# Altium PCB Wctrl-pcb1.PcbDoc (part 2 of 2)
Units mm, origin at the board's own origin, x right, y up, seen from the top; angles counter-clockwise.
Board outline 71 x 39 mm, 4 copper layers (Top Layer, Layer 1, Layer 2, Bottom Layer), stack 1.812 mm thick; 64 components, 75 nets, 267 pads, 81 vias.
Unrouted connection lines stored in the file: 1.
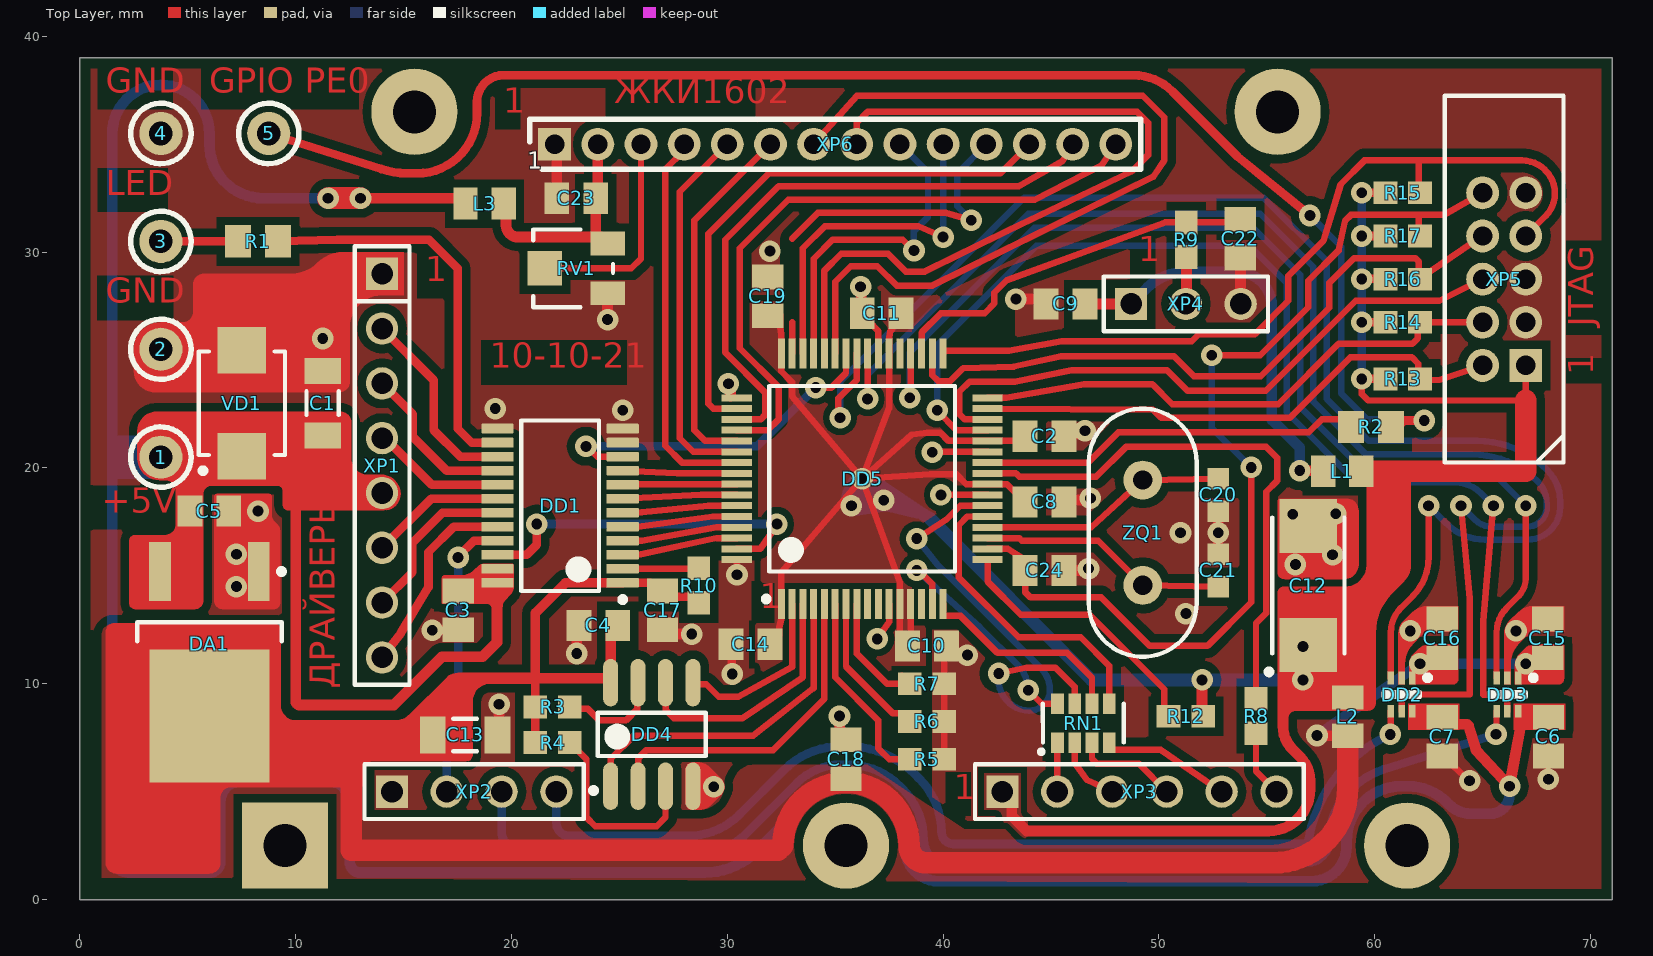
[diagram p0: Top Layer view]

## Other copper (continued)
Top Layer: (continued)
  region net +5VIN: 18.656,15.55 ccw(c18.656,15.294) 18.475,15.475 18.272,15.272 cw(c17.675,15.87) 17.675,15.025 16.9,15.025 ccw(c16.9,14.9) 16.775,14.9 16.775,13.75 ccw(c16.825,13.75) 16.825,13.7 18.875,13.7 cw(c18.875,13.5) 19.075,13.5 19.575,13.5 cw(c20.179,13.5) 19.752,13.927 19.923,14.098 ccw(c19.496,14.525) 20.1,14.525 20.1,15.5 ccw(c20.05,15.5) 20.05,15.55
  region net +5VIN: 11.5,33 ccw(c11.5,32.5) 11,32.5 ccw(c11.5,32.5) 11.5,32 13,32 ccw(c13,32.5) 13.5,32.5 ccw(c13,32.5) 13,33
  region net +3V3: 9,12.8 cw(c9,12.5) 9.3,12.5 9.3,9 ccw(c10,9) 10,8.3 14.576,8.3 ccw(c14.576,9.324) 15.3,8.6 16.988,10.288 cw(c17.5,9.776) 17.5,10.5 21.1,10.5 21.1,10 19,10 ccw(c19,9.2) 18.2,9.2 18.2,6.7 cw(c17.9,6.7) 17.9,6.4 13.5,6.4 ccw(c13.5,6.1) 13.2,6.1 13.2,5.4 cw(c13,5.4) 13,5.2 7,5.2 ccw(c7,4.7) 6.5,4.7 6.5,1.7 cw(c6,1.7) 6,1.2 1.7,1.2 cw(c1.7,1.7) 1.2,1.7 1.2,12.4 cw(c1.6,12.4) 1.6,12.8
  region net GND: 3.75,26.75 ccw(c3.75,25.5) 2.5,25.5 2.5,24.5 ccw(c3.5,24.5) 3.5,23.5 12,23.5 ccw(c12,24) 12.5,24 12.5,26.5 cw(c14,26.5) 14,28 15,28 15,30 12.207,30 ccw(c12.207,28.293) 11,29.5 cw(c9.793,30.707) 9.793,29 5.75,29 ccw(c5.75,28.5) 5.25,28.5 5.25,27.25 cw(c4.75,27.25) 4.75,26.75
  region net GND: 28.4,6.35 ccw(c28.4,6) 28.05,6 28.05,4.5 ccw(c28.4,4.5) 28.4,4.15 28.713,4.15 ccw(c28.713,4.843) 29.203,4.353 29.734,4.884 ccw(c29.392,5.225) 29.875,5.225 ccw(c29.392,5.225) 29.734,5.566 29.109,6.191 ccw(c28.725,5.807) 28.725,6.35
  region net GND: 6.35,18.796 ccw(c6.35,18.669) 6.223,18.669 6.223,13.843 ccw(c6.604,13.843) 6.604,13.462 9.017,13.462 ccw(c9.017,13.716) 9.271,13.716 9.271,17.092 ccw(c8.837,17.092) 9.144,17.399 8.98,17.563 cw(c9.197,17.78) 8.89,17.78 8.89,18.669 ccw(c8.763,18.669) 8.763,18.796
  region net +5VIN: 14.097,18.034 ccw(c14.097,18.796) 14.859,18.796 ccw(c13.97,18.796) 13.97,19.685 13.335,19.685 cw(c13.335,20.447) 12.573,20.447 12.573,22.098 ccw(c12.065,22.098) 12.065,22.606 3.556,22.606 ccw(c3.556,21.717) 2.667,21.717 2.667,20.447 ccw(c3.683,20.447) 3.683,19.431 3.937,19.431 cw(c3.937,18.923) 4.445,18.923 4.445,17.399 cw(c3.937,17.399) 3.937,16.891 2.54,16.891 ccw(c2.54,16.637) 2.286,16.637 2.286,13.716 ccw(c2.54,13.716) 2.54,13.462 5.334,13.462 ccw(c5.334,13.843) 5.715,13.843 5.715,18.796 cw(c6.096,18.796) 6.096,19.177 9.144,19.177 cw(c9.144,18.923) 9.398,18.923 9.398,18.288 ccw(c9.652,18.288) 9.652,18.034
  region net +5VIN: 63.93,9.07 61.555,9.07 61.555,7.87 63.93,7.87
  region net +5VIN: 68.825,9.075 66.45,9.075 66.45,7.875 68.825,7.875
  region: 67.025,25.5
  region: 13.97,18.034
  text "GND" at 1.2,37 h2
  text "GPIO PE0" at 6,37 h2
  text "ЖКИ1602" at 24.75,36.5 h2
  text "1" at 19.625,36.075 h2
  text "LED" at 1.2,32.25 h2
  text "1" at 49.05,29.175 h2
  text "1" at 16,28.25 h2
  text "GND" at 1.2,27.25 h2
  text "JTAG" at 70.525,26.55 h2 r90
  text "1" at 70.525,24.3 h2 r90
  text "10-10-21" at 19,24.25 h2
  text "+5V" at 1.016,17.526 h2
  text "1" at 31.5,13.1 h2
  text "ДРАЙВЕРЫ" at 12.192,9.779 h2 r90
  text "1" at 40.5,4.25 h2
Bottom Layer:
  region net +VM: 57.175,10.175 cw(c56.675,10.175) 56.675,9.675 cw(c56.675,10.175) 56.175,10.175 56.175,11.725 cw(c56.675,11.725) 56.675,12.225 cw(c56.675,11.725) 57.175,11.725
  region net +5VIN: 4.75,20.5 4.75,20.525 ccw(c3.775,20.525) 3.775,21.5 1.275,21.5 1.275,19.5 3.75,19.5 ccw(c3.75,20.5)
  region net +VM: 36,19.925 35.922,19.847 ccw(c37.544,18.225) 35.25,18.225 ccw(c35.725,18.225) 35.725,17.75 35.825,17.75 37.375,18 38.825,17.65 39.075,18.175 36.5,19.925 36.325,19.975 36.125,19.975
  region net +5VIN: 11.5,33 ccw(c11.5,32.5) 11,32.5 ccw(c11.5,32.5) 11.5,32 13,32 ccw(c13,32.5) 13.5,32.5 ccw(c13,32.5) 13,33
  region: 65,12.5
  region: 8.25,4.5

## Silkscreen, mask and mechanical layers (free items; w line width, h text height)
Top Solder:
  rectangle: 2.5,5 9.25,12

## Text inside footprints (layer, text, board x,y; h text height)
XP5: Top Assembly "1" at 68.25,23 h1 r90
XP6: Top Overlay "1" at 20.725,33.875 h0.8